# Altium PCB TSE_mother_board.PcbDoc
Units mm, origin at the board's own origin, x right, y up, seen from the top; angles counter-clockwise.
Board outline 56 x 65 mm, 4 copper layers (Top Layer, Layer 1, Layer 2, Bottom Layer), stack 1.282 mm thick; 27 components, 53 nets, 223 pads, 23 vias.
Unrouted connection lines stored in the file: 2.
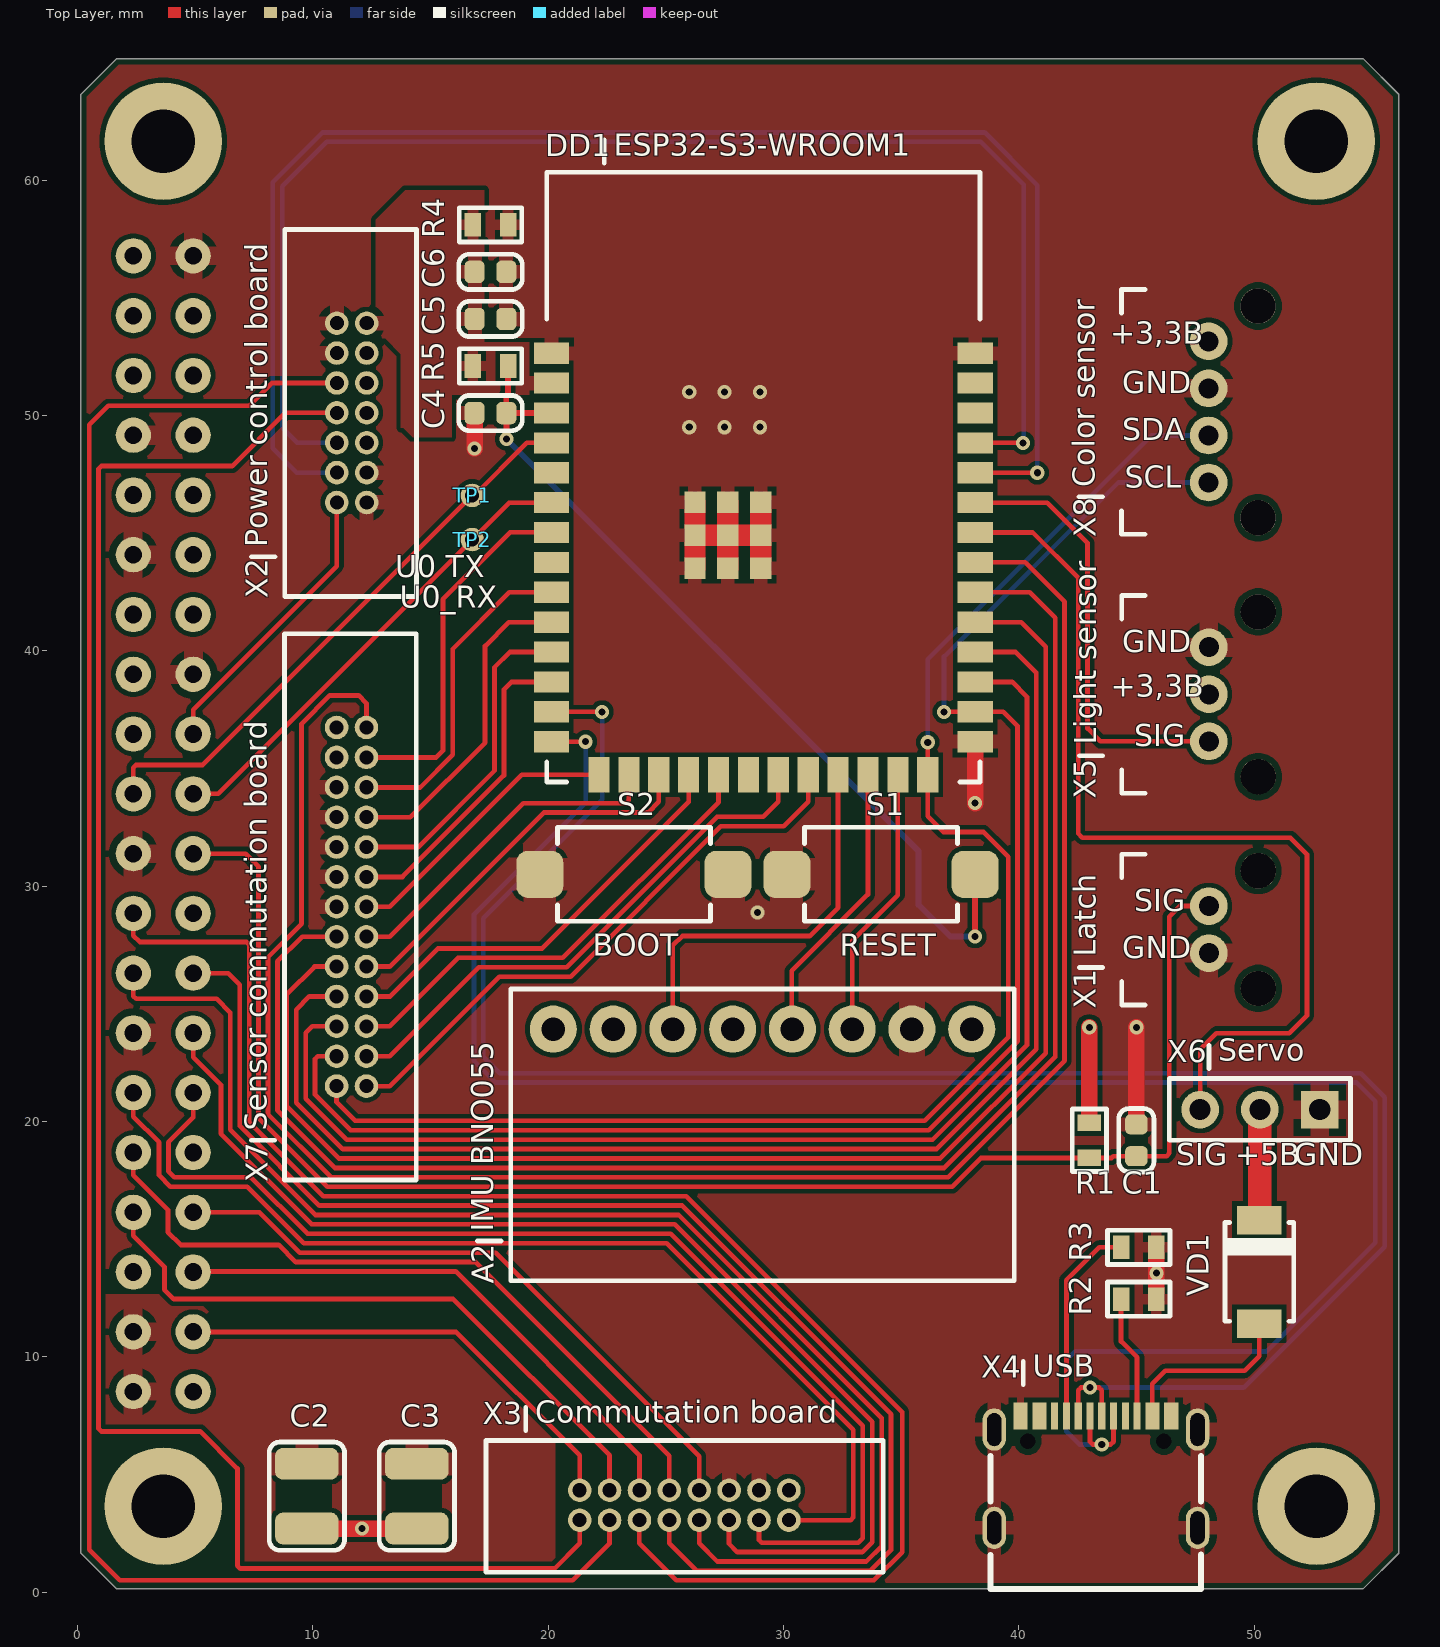
[diagram p0: Top Layer view]
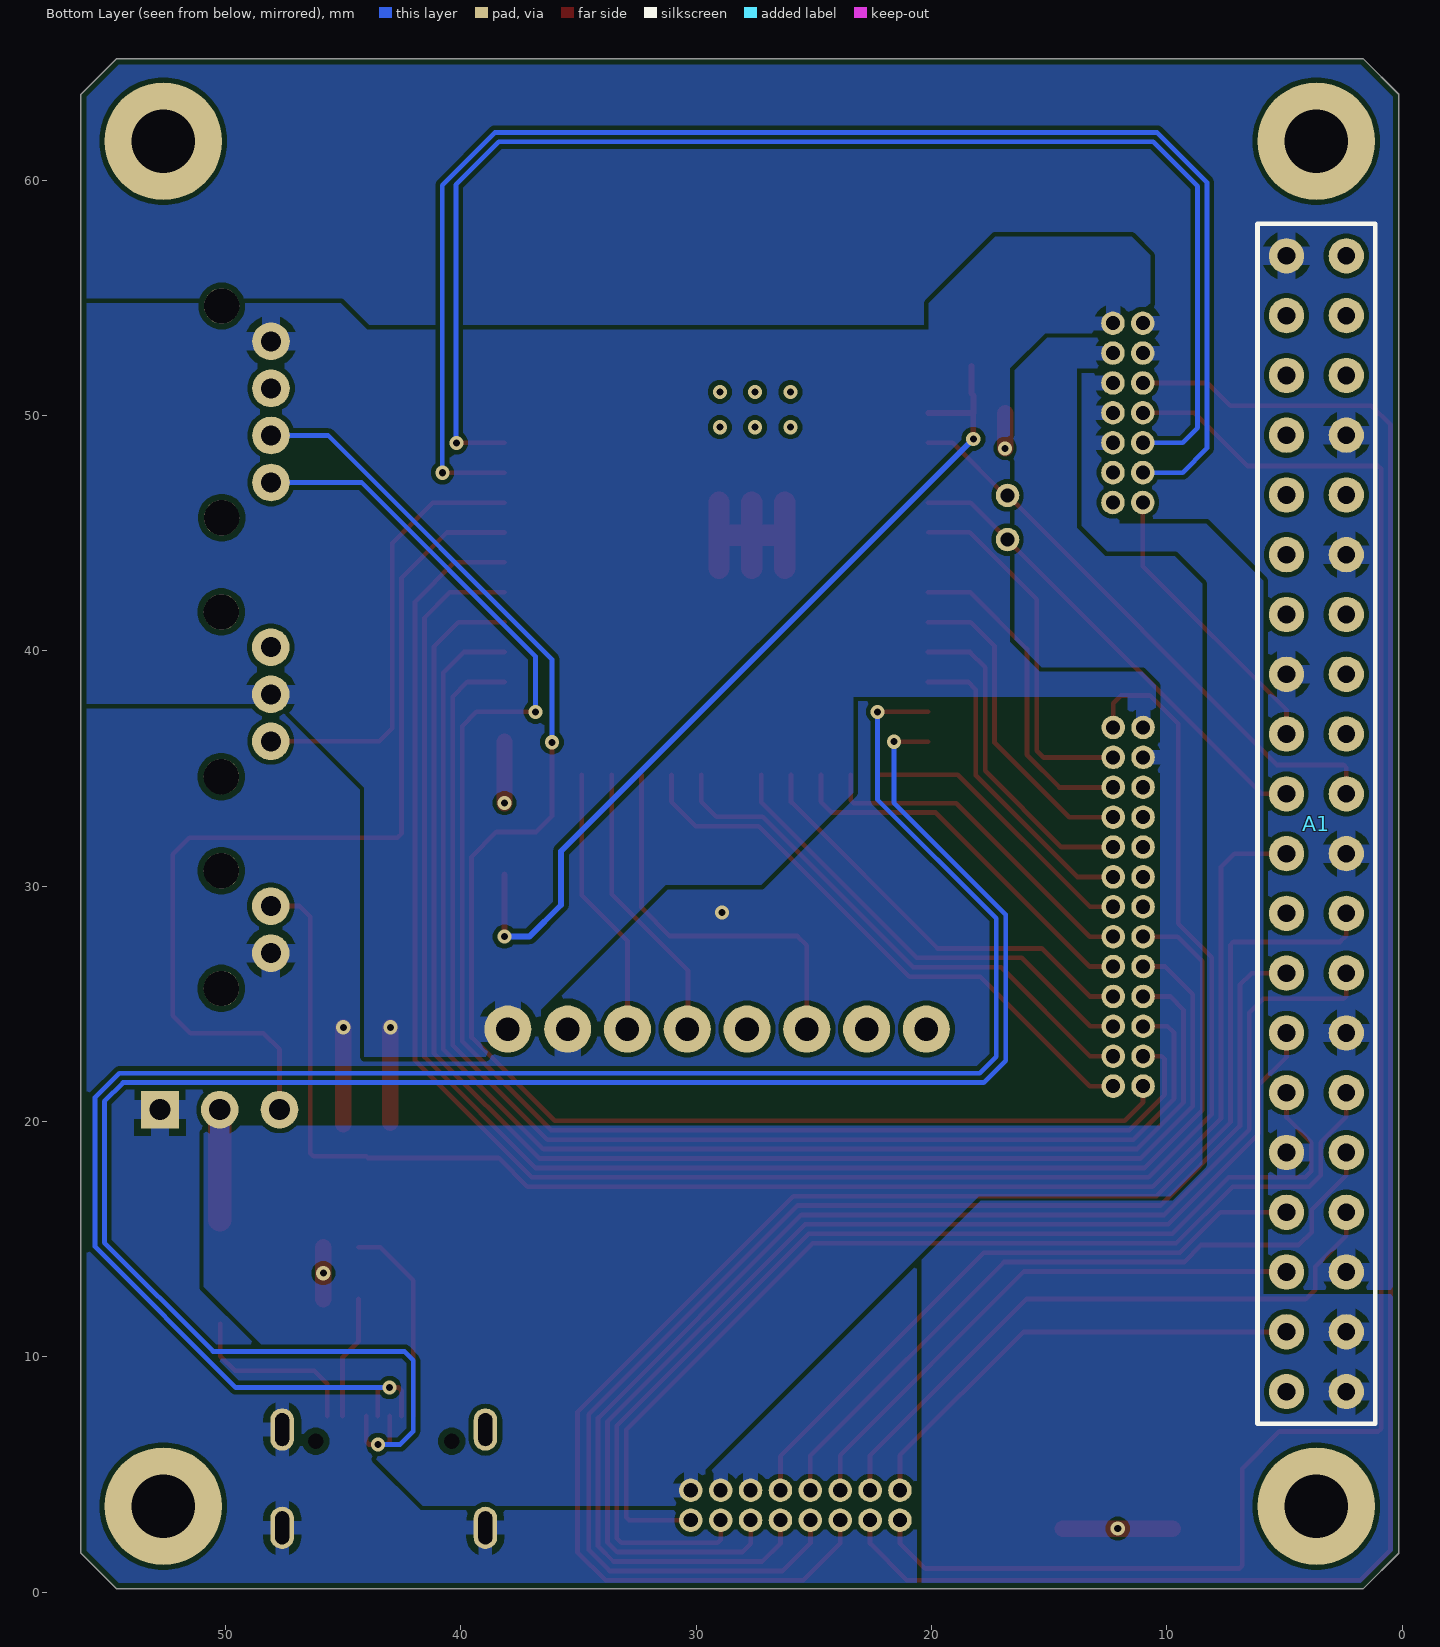
[diagram p1: Bottom Layer view, seen from below]
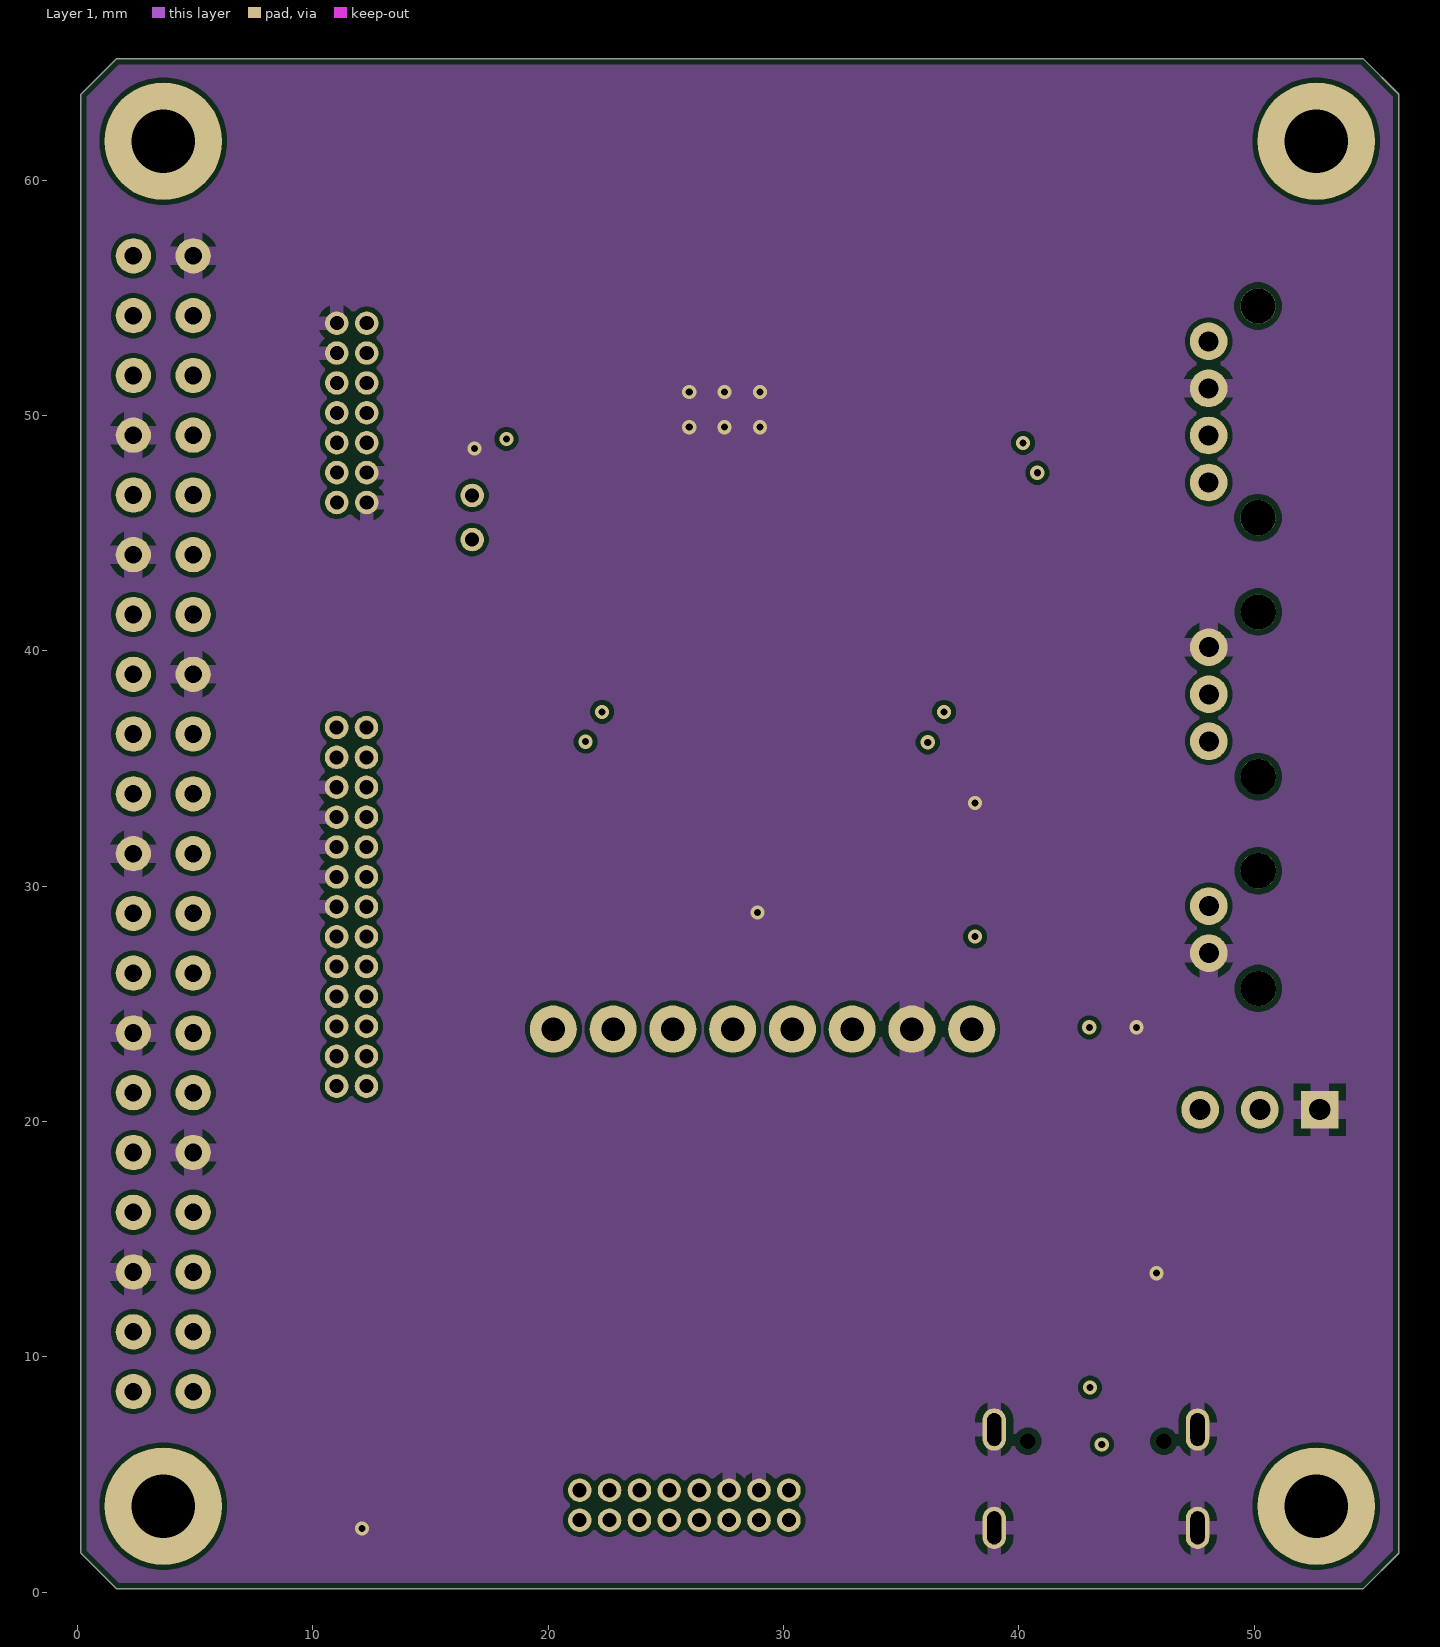
[diagram p2: Layer 1]
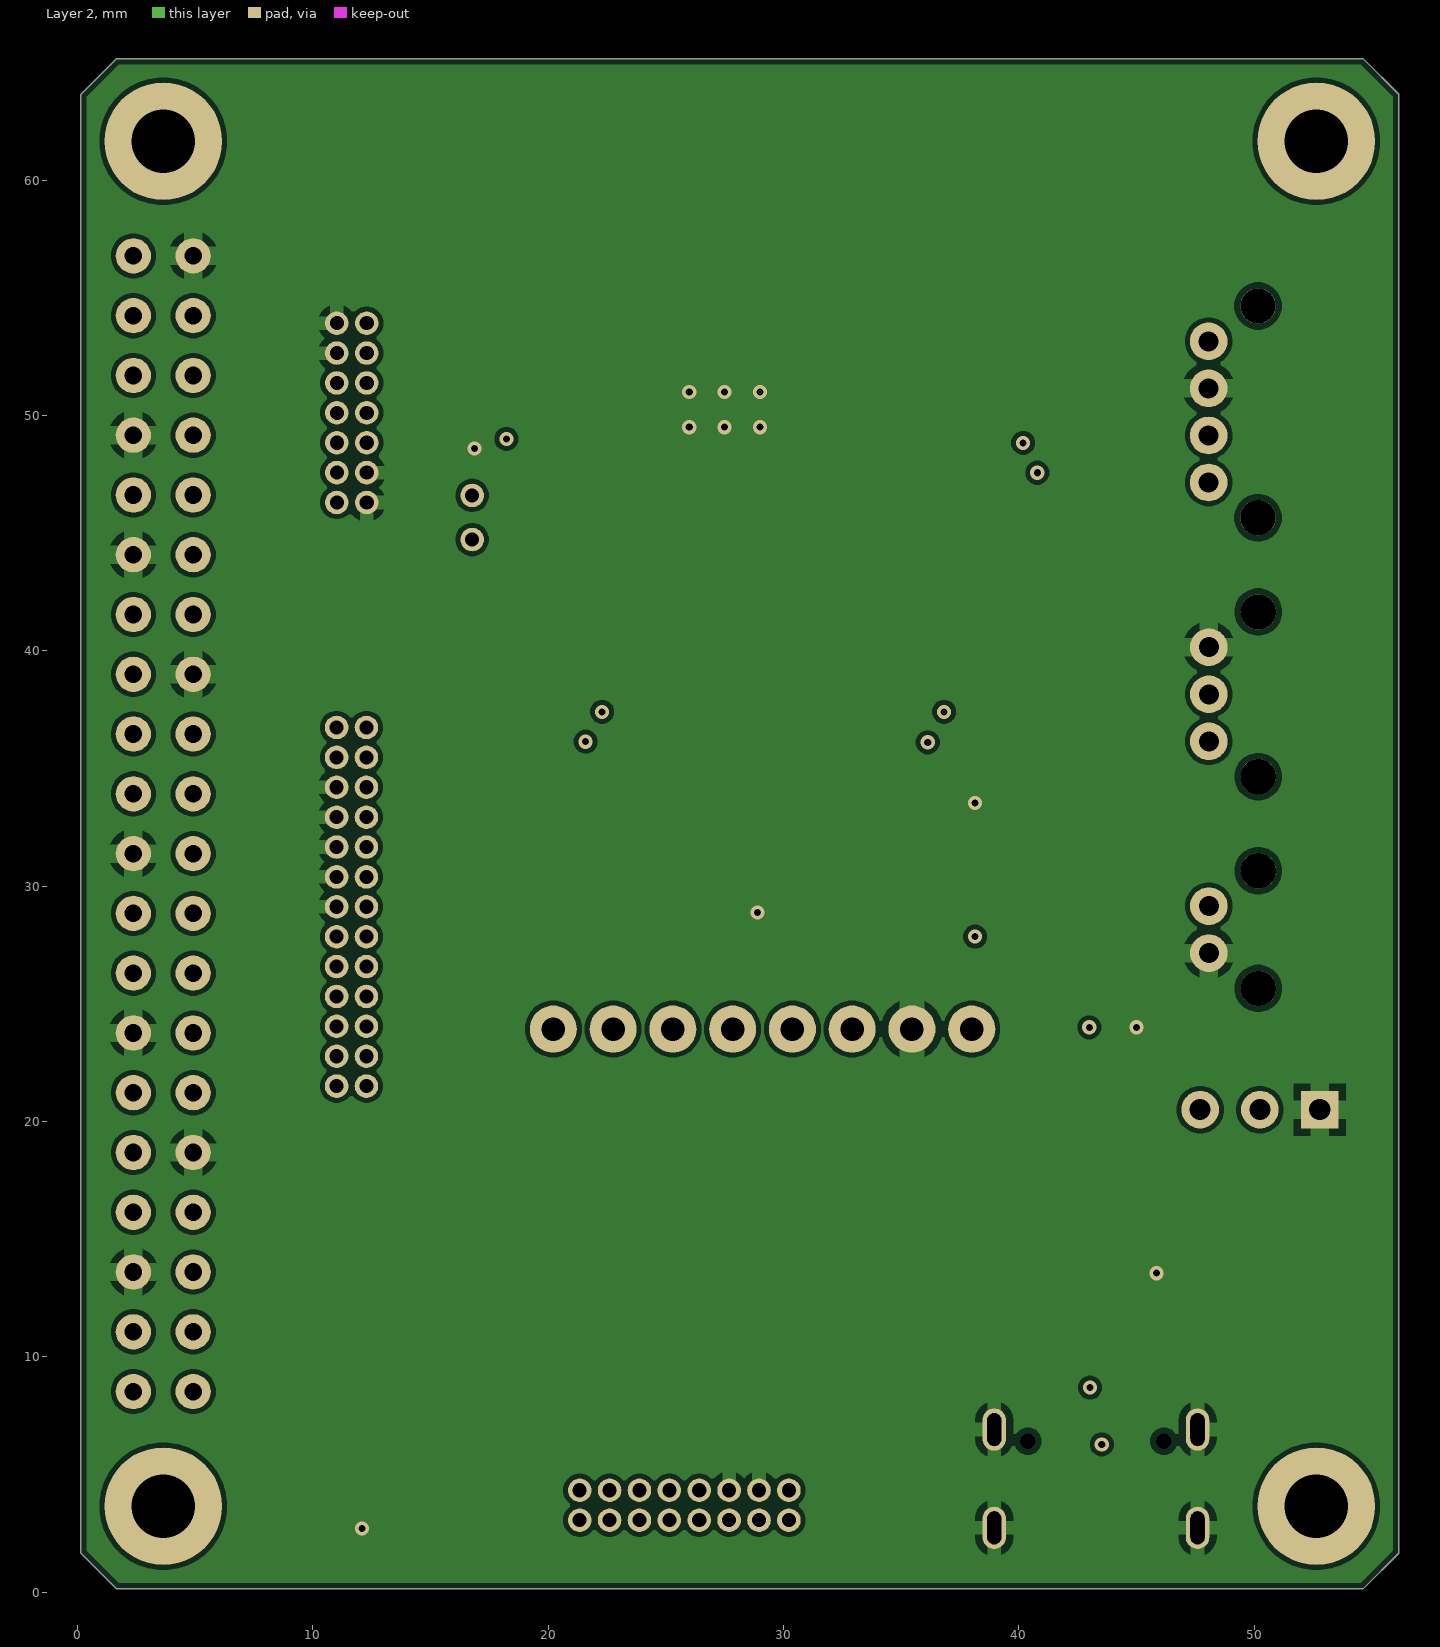
[diagram p3: Layer 2]
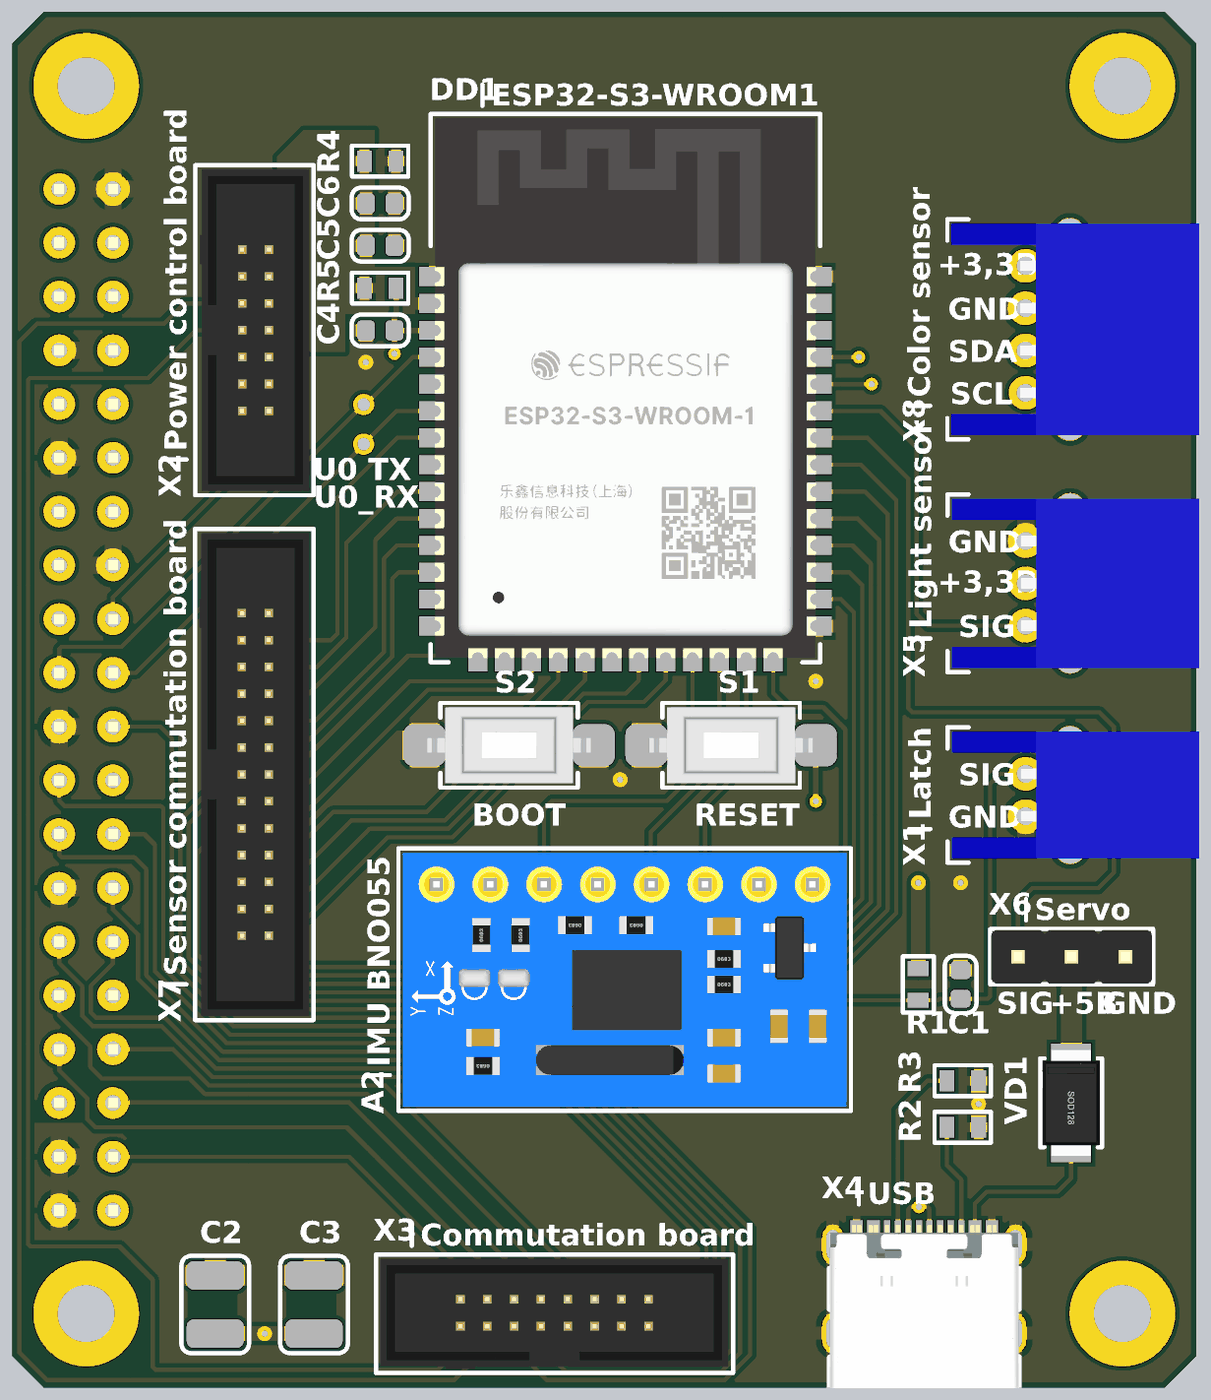
[diagram p4: 3D render of the assembled board from above, using the file's embedded part models]

## Layer stack, top to bottom
Top Solder: solder mask 0.0102, Solder Resist, Dk 3.5
Top Layer: signal copper 0.035
Dielectric 2: prepreg 0.0711, PP-006, Dk 4.1
Layer 1: signal copper 0.035
Dielectric 1: dielectric 1, FR-4, Dk 4.8
Layer 2: signal copper 0.035
Dielectric 5: prepreg 0.0711, PP-006, Dk 4.1
Bottom Layer: signal copper 0.035
Bottom Solder: solder mask 0.0102, Solder Resist, Dk 3.5

## Board outline
1.65,0.15 0.15,1.65 0.15,63.65 1.65,65.15 54.65,65.15 56.15,63.65 56.15,1.65 54.65,0.15

## Design rules (kind name [scope] priority, off if disabled: settings)
AcuteAngle min_acute_angle [OnCopper] p1: minimum=3.50000000000000E+0001 checktracksonly=FALSE // Минимальный угол между примитивами топологии
BoardOutlineClearance board_outline_clearance_std [NOT (OnLayer('Bottom Overlay') OR OnLayer('Top Overlay'))] p1: gap=0.25 ignorepadtopadclearanceinfootprint=FALSE except(0: Arc-SplitContinuation Track-SplitContinuation SMDPad-SplitContinuation THPad-SplitContinuation Via-SplitContinuation Fill-SplitContinuation Poly-SplitContinuation Region-SplitContinuation Text-SplitContinuation) // Отступ элементов топологии от края фрезеруемой печатной платы
Clearance clearance_outer_35um_std [OnTopLayer OR OnBottomLayer] p1: gap=0.2 ignorepadtopadclearanceinfootprint=TRUE except(0.25: Arc-Hole Track-Hole SMDPad-Hole THPad-Hole Via-Hole Fill-Hole Poly-Hole Region-Hole Text-Hole) // Зазоры на внешних слоях
Clearance clearance_inner_35um_std [NOT (OnTopLayer Or OnBottomLayer)] p2: gap=0.2 ignorepadtopadclearanceinfootprint=FALSE except(0.25: Arc-Hole Track-Hole SMDPad-Hole THPad-Hole Via-Hole Fill-Hole Poly-Hole Region-Hole Text-Hole) // Зазоры на внутренних слоях
ComponentClearance [All] p1: gap=0 collisioncheckmode=3 verticalgap=0 showdistances=FALSE
DiffPairsRouting diff_pairs_routing [All] p1: maxlimit=0.254 minlimit=0.127 mostfreqgap=0.254 toplayer_maxgap=0.127 toplayer_prefgap=0.127 toplayer_minwidth=0.143 toplayer_maxwidth=0.143 toplayer_prefwidth=0.143 midlayer1_minwidth=0.381 midlayer1_maxwidth=0.381 midlayer1_prefwidth=0.381 midlayer2_minwidth=0.381 midlayer2_maxwidth=0.381 midlayer2_prefwidth=0.381 bottomlayer_maxgap=0.127 bottomlayer_prefgap=0.127 bottomlayer_minwidth=0.143 bottomlayer_maxwidth=0.143 bottomlayer_prefwidth=0.143 impedanceprofiledriven=TRUE impedanceprofileid={FD46899E-B5A2-4EF5-A302-5D2DB6A51F35} maxuncoupledlength=12.7 // Правила трассировки дифференциальных пар
HoleSize min_hole_size_std [IsPad] p1: absolutevalues=TRUE maxlimit=5.9 minlimit=0.6 maxpercent=80.000 minpercent=20.000 // Диаметр межслойного переходного отверстия
HoleSize min_hole_size_via_std [IsVia] p2: absolutevalues=TRUE maxlimit=5.9 minlimit=0.3 maxpercent=80.000 minpercent=20.000 // Минимальный диаметр монтажного отверстия
HoleToHoleClearance hole_to_hole_clearance_std [All] p1: gap=0.2 allowstackedmicrovias=FALSE // Минимальное расстояние между краями двух отверстий
MinimumAnnularRing min_via_ar_std [All] p1: minimumring=0.15 // Поясок площадки переходного отверстия (Annular ring VIA)
MinimumAnnularRing min_pad_ar_std [All] p2: minimumring=0.2 // Поясок монтажной контактной площадки (Annular ring PAD)
MinimumSolderMaskSliver min_solder_mask_bridge_std [All] p1: minsoldermaskwidth=0.15 // Мнимальная ширина масочного мостика
PlaneClearance plane_clearance_35um_std [All] p1: clearance=0.2 // Отступ полигона (для слоя plane) от элементов топологии
PlaneConnect [All] p1: planeconnectstyle=Relief reliefexpansion=0.5 reliefentries=4 reliefconductorwidth=0.2 reliefairgap=0.2
PolygonConnect poly_connect_to_pad<=0.3 [(AsMM(PadXSize_AllLayers)<=0.301) or (AsMM(PadYSize_AllLayers)<=0.301)] p1: thpad.connectstyle=Relief thpad.reliefconductorwidth=0.2 thpad.reliefentries=4 thpad.polygonreliefangle="90 Angle" thpad.airgapwidth=0.2 smdpad.connectstyle=Relief smdpad.reliefconductorwidth=0.2 smdpad.reliefentries=4 smdpad.polygonreliefangle="90 Angle" smdpad.airgapwidth=0.2 via.connectstyle=Direct via.reliefconductorwidth=0.254 via.reliefentries=4 via.polygonreliefangle="90 Angle" via.airgapwidth=0.254 // Правила подключения полигонов для падов от 0,3мм и меньше
PolygonConnect poly_connect_to_pad<=0.4 [(AsMM(PadXSize_AllLayers)<=0.401) or (AsMM(PadYSize_AllLayers)<=0.401)] p2: thpad.connectstyle=Relief thpad.reliefconductorwidth=0.26 thpad.reliefentries=4 thpad.polygonreliefangle="90 Angle" thpad.airgapwidth=0.2 smdpad.connectstyle=Relief smdpad.reliefconductorwidth=0.26 smdpad.reliefentries=4 smdpad.polygonreliefangle="90 Angle" smdpad.airgapwidth=0.2 via.connectstyle=Direct via.reliefconductorwidth=0.254 via.reliefentries=4 via.polygonreliefangle="90 Angle" via.airgapwidth=0.254 // Правила подключения полигонов для падов от 0,4 и меньше
PolygonConnect poly_connect_to_pad<=0.6 [(AsMM(PadXSize_AllLayers)<=0.601) or (AsMM(PadYSize_AllLayers)<=0.601)] p3: thpad.connectstyle=Relief thpad.reliefconductorwidth=0.33 thpad.reliefentries=4 thpad.polygonreliefangle="90 Angle" thpad.airgapwidth=0.2 smdpad.connectstyle=Relief smdpad.reliefconductorwidth=0.33 smdpad.reliefentries=4 smdpad.polygonreliefangle="90 Angle" smdpad.airgapwidth=0.2 via.connectstyle=Direct via.reliefconductorwidth=0.254 via.reliefentries=4 via.polygonreliefangle="90 Angle" via.airgapwidth=0.254 // Правила подключения полигонов для падов от 0,6мм и меньше
PolygonConnect poly_connect_to_pad<=0.7 [(AsMM(PadXSize_AllLayers)<=0.701) or (AsMM(PadYSize_AllLayers)<=0.701)] p4: thpad.connectstyle=Relief thpad.reliefconductorwidth=0.46 thpad.reliefentries=4 thpad.polygonreliefangle="90 Angle" thpad.airgapwidth=0.2 smdpad.connectstyle=Relief smdpad.reliefconductorwidth=0.46 smdpad.reliefentries=4 smdpad.polygonreliefangle="90 Angle" smdpad.airgapwidth=0.2 via.connectstyle=Direct via.reliefconductorwidth=0.254 via.reliefentries=4 via.polygonreliefangle="90 Angle" via.airgapwidth=0.254 // Правила подключения полигонов для падов от 0,7мм и меньше
PolygonConnect poly_connect_to_pad<=0.8 [(AsMM(PadXSize_AllLayers)<=0.8)or(AsMM(PadYSize_AllLayers)<=0.8)] p5: thpad.connectstyle=Relief thpad.reliefconductorwidth=0.53 thpad.reliefentries=4 thpad.polygonreliefangle="90 Angle" thpad.airgapwidth=0.3 smdpad.connectstyle=Relief smdpad.reliefconductorwidth=0.53 smdpad.reliefentries=4 smdpad.polygonreliefangle="90 Angle" smdpad.airgapwidth=0.2 via.connectstyle=Direct via.reliefconductorwidth=0.254 via.reliefentries=4 via.polygonreliefangle="90 Angle" via.airgapwidth=0.254 // Правила подключения полигонов для падов от 0,8мм и меньше
PolygonConnect poly_connect_to_pad<=1 [(AsMM(PadXSize_AllLayers)<=1.01)or(AsMM(PadYSize_AllLayers)<=1.01)] p6: thpad.connectstyle=Relief thpad.reliefconductorwidth=0.6 thpad.reliefentries=4 thpad.polygonreliefangle="90 Angle" thpad.airgapwidth=0.3 smdpad.connectstyle=Relief smdpad.reliefconductorwidth=0.6 smdpad.reliefentries=4 smdpad.polygonreliefangle="90 Angle" smdpad.airgapwidth=0.2 via.connectstyle=Direct via.reliefconductorwidth=0.254 via.reliefentries=4 via.polygonreliefangle="90 Angle" via.airgapwidth=0.254 // Правила подключения полигонов для падов от 1мм и меньше
PolygonConnect poly_connect_to_pad<=1.3 [(AsMM(PadXSize_AllLayers)<=1.31)or(AsMM(PadYSize_AllLayers)<=1.31)] p7: thpad.connectstyle=Relief thpad.reliefconductorwidth=0.66 thpad.reliefentries=4 thpad.polygonreliefangle="90 Angle" thpad.airgapwidth=0.3 smdpad.connectstyle=Relief smdpad.reliefconductorwidth=0.86 smdpad.reliefentries=4 smdpad.polygonreliefangle="90 Angle" smdpad.airgapwidth=0.2 via.connectstyle=Direct via.reliefconductorwidth=0.254 via.reliefentries=4 via.polygonreliefangle="90 Angle" via.airgapwidth=0.254 // Правила подключения полигонов для падов от 1,3мм и меньше
PolygonConnect poly_connect_to_pad<=1.6 [(AsMM(PadXSize_AllLayers)<=1.61)or(AsMM(PadYSize_AllLayers)<=1.61)] p8: thpad.connectstyle=Relief thpad.reliefconductorwidth=0.8 thpad.reliefentries=4 thpad.polygonreliefangle="90 Angle" thpad.airgapwidth=0.3 smdpad.connectstyle=Relief smdpad.reliefconductorwidth=1 smdpad.reliefentries=4 smdpad.polygonreliefangle="90 Angle" smdpad.airgapwidth=0.2 via.connectstyle=Direct via.reliefconductorwidth=0.254 via.reliefentries=4 via.polygonreliefangle="90 Angle" via.airgapwidth=0.254 // Правила подключения полигонов для падов от 1,6мм и меньше
PolygonConnect poly_connect_to_pad<=1.8 [(AsMM(PadXSize_AllLayers)<=1.8)or(AsMM(PadYSize_AllLayers)<=1.8)] p9: thpad.connectstyle=Relief thpad.reliefconductorwidth=1 thpad.reliefentries=4 thpad.polygonreliefangle="90 Angle" thpad.airgapwidth=0.3 smdpad.connectstyle=Relief smdpad.reliefconductorwidth=1.2 smdpad.reliefentries=4 smdpad.polygonreliefangle="90 Angle" smdpad.airgapwidth=0.2 via.connectstyle=Direct via.reliefconductorwidth=0.254 via.reliefentries=4 via.polygonreliefangle="90 Angle" via.airgapwidth=0.254 // Правила подключения полигонов для падов от 1,8мм и меньше
PolygonConnect poly_connect_to_pad<=2 [(AsMM(PadXSize_AllLayers)<=2.01)or(AsMM(PadYSize_AllLayers)<=2.01)] p10: thpad.connectstyle=Relief thpad.reliefconductorwidth=1.1 thpad.reliefentries=4 thpad.polygonreliefangle="90 Angle" thpad.airgapwidth=0.3 smdpad.connectstyle=Relief smdpad.reliefconductorwidth=1.4 smdpad.reliefentries=4 smdpad.polygonreliefangle="90 Angle" smdpad.airgapwidth=0.2 via.connectstyle=Direct via.reliefconductorwidth=0.254 via.reliefentries=4 via.polygonreliefangle="90 Angle" via.airgapwidth=0.254 // Правила подключения полигонов для падов от 2мм и меньше
PolygonConnect poly_connect_to_pad<=2.3 [(AsMM(PadXSize_AllLayers)<=2.31)or(AsMM(PadYSize_AllLayers)<=2.31)] p11: thpad.connectstyle=Relief thpad.reliefconductorwidth=1.2 thpad.reliefentries=4 thpad.polygonreliefangle="90 Angle" thpad.airgapwidth=0.3 smdpad.connectstyle=Relief smdpad.reliefconductorwidth=1.4 smdpad.reliefentries=4 smdpad.polygonreliefangle="90 Angle" smdpad.airgapwidth=0.2 via.connectstyle=Direct via.reliefconductorwidth=0.254 via.reliefentries=4 via.polygonreliefangle="90 Angle" via.airgapwidth=0.254 // Правила подключения полигонов для падов от 2,3мм и меньше
PolygonConnect poly_connect_to_pad<=2.5 [(AsMM(PadXSize_AllLayers)<=2.51)or(AsMM(PadYSize_AllLayers)<=2.51)] p12: thpad.connectstyle=Relief thpad.reliefconductorwidth=1.2 thpad.reliefentries=4 thpad.polygonreliefangle="90 Angle" thpad.airgapwidth=0.3 smdpad.connectstyle=Relief smdpad.reliefconductorwidth=1.4 smdpad.reliefentries=4 smdpad.polygonreliefangle="90 Angle" smdpad.airgapwidth=0.2 via.connectstyle=Direct via.reliefconductorwidth=0.254 via.reliefentries=4 via.polygonreliefangle="90 Angle" via.airgapwidth=0.254 // Правила подключения полигонов для падов от 2,5мм и меньше
PolygonConnect poly_connect_to_pad<=2.7 [(AsMM(PadXSize_AllLayers)<=2.71)or(AsMM(PadYSize_AllLayers)<=2.71)] p13: thpad.connectstyle=Relief thpad.reliefconductorwidth=1.4 thpad.reliefentries=4 thpad.polygonreliefangle="90 Angle" thpad.airgapwidth=0.3 smdpad.connectstyle=Relief smdpad.reliefconductorwidth=1.6 smdpad.reliefentries=4 smdpad.polygonreliefangle="90 Angle" smdpad.airgapwidth=0.2 via.connectstyle=Direct via.reliefconductorwidth=0.254 via.reliefentries=4 via.polygonreliefangle="90 Angle" via.airgapwidth=0.254 // Правила подключения полигонов для падов от 2,7мм и меньше
PolygonConnect poly_connect_to_pad<=3 [(AsMM(PadXSize_AllLayers)<=3.01)or(AsMM(PadYSize_AllLayers)<=3.01)] p14: thpad.connectstyle=Relief thpad.reliefconductorwidth=1.6 thpad.reliefentries=4 thpad.polygonreliefangle="90 Angle" thpad.airgapwidth=0.3 smdpad.connectstyle=Relief smdpad.reliefconductorwidth=1.8 smdpad.reliefentries=4 smdpad.polygonreliefangle="90 Angle" smdpad.airgapwidth=0.2 via.connectstyle=Direct via.reliefconductorwidth=0.254 via.reliefentries=4 via.polygonreliefangle="90 Angle" via.airgapwidth=0.254 // Правила подключения полигонов для падов от 3мм и меньше
PolygonConnect poly_connect_to_pad<=7 [(AsMM(PadXSize_AllLayers)<7.01)or(AsMM(PadYSize_AllLayers)<=7.01)] p15: thpad.connectstyle=Relief thpad.reliefconductorwidth=2 thpad.reliefentries=4 thpad.polygonreliefangle="90 Angle" thpad.airgapwidth=0.4 smdpad.connectstyle=Relief smdpad.reliefconductorwidth=2 smdpad.reliefentries=4 smdpad.polygonreliefangle="90 Angle" smdpad.airgapwidth=0.3 via.connectstyle=Direct via.reliefconductorwidth=0.254 via.reliefentries=4 via.polygonreliefangle="90 Angle" via.airgapwidth=0.254 // Правила подключения полигонов для падов от 7мм и меньше
PolygonConnect poly_connect_to_pad [All] p16: thpad.connectstyle=Relief thpad.reliefconductorwidth=0.25 thpad.reliefentries=4 thpad.polygonreliefangle="90 Angle" thpad.airgapwidth=0.2 smdpad.connectstyle=Relief smdpad.reliefconductorwidth=0.25 smdpad.reliefentries=4 smdpad.polygonreliefangle="90 Angle" smdpad.airgapwidth=0.2 via.connectstyle=Direct via.reliefconductorwidth=0.25 via.reliefentries=4 via.polygonreliefangle="90 Angle" via.airgapwidth=0.2 // Правила подключения полигонов общие
RoutingCorners [All] p1 off: cornerstyle=45-Degree minsetback=2.5 maxsetback=2.5
RoutingVias [All] p1: holewidth=0.3 width=0.6 viastyle="Through Hole" minholewidth=0.3 minwidth=0.6 maxholewidth=5.9 maxwidth=6.4
SilkToSilkClearance silk_to_silk_clearance_std [All] p1 off: silktosilkclearance=0.15 // Отступ текста шелкографии от других примитивов шелкографии
SilkToSolderMaskClearance silk_to_solder_mask_clearance_std [IsPad] p1 off: minsilkscreentomaskgap=0.15 clearancetoexposedcopper=FALSE // Минимальное расстояние между элементами шелкографии и вскрытой медью
SolderMaskExpansion solder_mask_expansion_std [All] p1: expansion=0.05 istentingtop=FALSE // Припуск паяльной масски
SupplyNets "Schematic Supply Nets" [InNet('GND')] p1: voltage=0.000
SupplyNets "Schematic Supply Nets_3" [InNet('+5В')] p2: voltage=0.000
SupplyNets "Schematic Supply Nets_2" [InNet('+3,3В')] p3: voltage=0.000
SupplyNets "Schematic Supply Nets_1" [InNet('+5В_RPI')] p4: voltage=0.000
UnRoutedNet [All] p1: checkbadconnections=TRUE
Width width_35um_std [All] p1: maxlimit=10 minlimit=0.2 preferedwidth=0.2 checkconnectedcopper=TRUE // Ширина проводников (общая)
19 further rules are at their usual default settings.

## Classes and differential pairs
component class TSE_mother_board_periph_commutation: A2 X5 X6 X7 X8
component class TSE_mother_board_MCU: C4 C5 C6 DD1 R2 R3 R4 R5 S1 S2 TP1 TP2 VD1 X4
component class TSE_mother_board_CPU_commutation: A1 C1 C2 C3 R1 X1 X2 X3

## Components (designator, comment, footprint, x,y, rotation, side; value= is the part's Value field where it differs from the comment)
A1 "Raspberry Pi 5" PLS_40 3.65,32.65 r90 bottom
A2 "BNO055" BNO055 29.115,23.925 r180 top
C1 "0,1мк" C0603 45,19.2 r270 top
C2 "10мк" C1210 9.753,4.075 r90 top
C3 "10мк" C1210 14.428,4.075 r90 top
C4 "0,1мк" C0603 17.554,50.1 r0 top
C5 "0,1мк" C0603 17.554,54.1 r180 top
C6 "0,1мк" C0603 17.554,56.1 r180 top
DD1 "ESP32-S3-WROOM-1-N8" ESP32-S3-WROOM-1 29.15,43.69 r0 top
R1 "10к" R0603 43,19.2 r90 top
R2 "5,1к" R0603 45.1,12.45 r180 top
R3 "5,1к" R0603 45.1,14.65 r180 top
R4 "10к" R0603 17.554,58.1 r180 top
R5 "10к" R0603 17.554,52.1 r180 top
S1 "IT-1187" "SMD button 6x3mm" 30.15,30.5 r0 top
S2 "IT-1187" "SMD button 6x3mm" 19.65,30.5 r0 top
TP1 "TESTPOINT" TP_0,6X1 16.775,46.6 r90 top
TP2 "TESTPOINT" TP_0,6X1 16.775,44.725 r90 top
VD1 "PMEG3050EP" SOD128 50.225,13.6 r270 top
X1 "JST-S02B-PASK-2" JST-S02B-PASK-2 48.08,28.15 r270 top
X2 "IDC_14" IDC1.27_14 11.66,50.11 r270 top
X3 "IDC_16" IDC1.27_16 25.79,3.69 r0 top
X4 "USB Type-C" USB4105-15-A-120 43.28,0.127 r0 top
X5 "JST-S03B-PASK-2" JST-S03B-PASK-2 48.08,38.15 r270 top
X6 "PLS 3" pls-2,54-3-tht-v 50.25,20.5 r180 top
X7 "IDC_26" IDC1.27_26 11.65,29.12 r270 top
X8 "JST-S04B-PASK-2" JST-S04B-PASK-2 48.07,50.15 r270 top

## Footprints (in the part's own frame and the unit in brackets; to place one, negate y for a bottom-side part, rotate by r counter-clockwise, add the part's x,y. Pads: shape width x height; smd on the part's side, far side on the other; paste and mask are expansions set on the pad)
BNO055 [mm] "9-осевой гироскоп и акселерометр"
  round 2 hole 1: 1(-8.89,0) 2(-6.35,0) 3(-3.81,0) 4(-1.27,0) 5(1.27,0) 6(3.81,0) 7(6.35,0) 8(8.89,0)
  silkscreen extent -10.7,-1.7 10.7,10.7, body extent -10.5,-1.5 10.5,10.5, height 8.5
C0603 [mm] "Chip Capacitor, 2-Leads, Body 1,60x0,80mm, IPC Medium Density"
  rrect50% 0.85x0.95 smd: 1(-0.675,0) 2(0.675,0)
  Top Layer pour cut-out: -0.254,0.5 -0.254,-0.5 0.254,-0.5 0.254,0.5
  silkscreen extent -1.35,-0.75 1.35,0.75, body extent -0.85,-0.45 0.85,0.45, height 0.9
C1210 [mm] "Chip Capacitor, 2-Leads, Body 3,20x2,50mm, IPC Medium Density"
  rrect50% 1.35x2.7 smd: 1(-1.375,0) 2(1.375,0)
  Top Layer pour cut-out: -0.6,1.325 -0.6,-1.05 0.6,-1.05 0.6,1.325
  silkscreen extent -2.3,-1.6 2.3,1.6, body extent -1.7,-1.35 1.7,1.35, height 2.7
ESP32-S3-WROOM-1 [mm]
  rect 1.5x0.9 smd: 1(-9,8.955) 2(-9,7.685) 3(-9,6.415) 4(-9,5.145) 5(-9,3.875) 6(-9,2.605) 7(-9,1.335) 8(-9,0.065) 9(-9,-1.205) 10(-9,-2.475) 11(-9,-3.745) 12(-9,-5.015) 13(-9,-6.285) 14(-9,-7.555) 27(9,-7.555) 28(9,-6.285) 29(9,-5.015) 30(9,-3.745) 31(9,-2.475) 32(9,-1.205) 33(9,0.065) 34(9,1.335) 35(9,2.605) 36(9,3.875) 37(9,5.145) 38(9,6.415) 39(9,7.685) 40(9,8.955)
  rect 0.9x1.5 smd: 15(-6.985,-8.955) 16(-5.715,-8.955) 17(-4.445,-8.955) 18(-3.175,-8.955) 19(-1.905,-8.955) 20(-0.635,-8.955) 21(0.635,-8.955) 22(1.905,-8.955) 23(3.175,-8.955) 24(4.445,-8.955) 25(5.715,-8.955) 26(6.985,-8.955)
  rect 0.9x0.9 smd: 41(-2.91,-0.18) 41(-2.91,1.22) 41(-2.91,2.62) 41(-1.51,-0.18) 41(-1.51,1.22) 41(-1.51,2.62) 41(-0.11,-0.18) 41(-0.11,1.22) 41(-0.11,2.62)
  silkscreen extent -9.21,-9.27 9.21,16.64, body extent -9.01,-9.07 9.01,16.44, height 3.11
IDC1.27_14 [mm] "Разъем - 14 конт. прямая вилка на плату с шагом 1.27мм"
  round 1 hole 0.6: 1(-3.81,0.635) 2(-2.54,0.635) 3(-1.27,0.635) 4(0,0.635) 5(1.27,0.635) 6(2.54,0.635) 7(3.81,0.635) 8(-3.81,-0.635) 9(-2.54,-0.635) 10(-1.27,-0.635) 11(0,-0.635) 12(1.27,-0.635) 13(2.54,-0.635) 14(3.81,-0.635)
  silkscreen extent -7.8,-2.85 7.8,2.75, body extent -7.59,-2.65 7.59,2.55, height 5.4
IDC1.27_16 [mm] "Разъем - 16 конт. прямая вилка на плату с шагом 1.27мм"
  round 1 hole 0.6: 1(4.445,0.635) 2(3.175,0.635) 3(1.905,0.635) 4(0.635,0.635) 5(-0.635,0.635) 6(-1.905,0.635) 7(-3.175,0.635) 8(-4.445,0.635) 9(4.445,-0.635) 10(3.175,-0.635) 11(1.905,-0.635) 12(0.635,-0.635) 13(-0.635,-0.635) 14(-1.905,-0.635) 15(-3.175,-0.635) 16(-4.445,-0.635)
  silkscreen extent -8.43,-2.85 8.45,2.75, body extent -8.23,-2.65 8.23,2.55, height 5.4
IDC1.27_26 [mm] "Разъем - 26 конт. прямая вилка на плату с шагом 1.27мм"
  round 1 hole 0.6: 1(-7.62,-0.635) 2(-6.35,-0.635) 3(-5.08,-0.635) 4(-3.81,-0.635) 5(-2.54,-0.635) 6(-1.27,-0.635) 7(0,-0.635) 8(1.27,-0.635) 9(2.54,-0.635) 10(3.81,-0.635) 11(5.08,-0.635) 12(6.35,-0.635) 13(7.62,-0.635) 14(-7.62,0.635) 15(-6.35,0.635) 16(-5.08,0.635) 17(-3.81,0.635) 18(-2.54,0.635) 19(-1.27,0.635) 20(0,0.635) 21(1.27,0.635) 22(2.54,0.635) 23(3.81,0.635) 24(5.08,0.635) 25(6.35,0.635) 26(7.62,0.635)
  silkscreen extent -11.61,-2.85 11.6,2.75, body extent -11.4,-2.65 11.4,2.55, height 5.4
JST-S02B-PASK-2 [mm] "Разъем - 2 конт. угловая вилка на плату, шаг 2,00 мм"
  round 1.6 hole 0.85: 1(-1,0) 2(1,0)
  round 1.5 hole 1.5: 3(-2.5,2.1) 3(2.5,2.1)
  silkscreen extent -3.2,-3.7 3.2,-2.7, body extent -3,-3.5 3,8.2, height 6.5
JST-S03B-PASK-2 [mm] "Разъем - 3 конт. угловая вилка на плату, шаг 2,00 мм"
  round 1.6 hole 0.85: 1(-2,0) 2(0,0) 3(2,0)
  round 1.5 hole 1.5: 4(-3.5,2.1) 4(3.5,2.1)
  silkscreen extent -4.2,-3.7 4.2,-2.7, body extent -4,-3.5 4,8.2, height 6.5
JST-S04B-PASK-2 [mm] "Разъем - 4 конт. угловая вилка на плату, шаг 2,00 мм"
  round 1.6 hole 0.85: 1(-3,0) 2(-1,0) 3(1,0) 4(3,0)
  round 1.5 hole 1.5: 5(-4.5,2.1) 5(4.5,2.1)
  silkscreen extent -5.2,-3.7 5.2,-2.7, body extent -5,-3.5 5,8.2, height 6.5
pls-2,54-3-tht-v [mm]
  rect 1.6x1.6 hole 0.9: 1(-2.54,0)
  round 1.6 hole 0.9: 2(0,0) 3(2.54,0)
  silkscreen extent -3.85,-1.33 3.85,1.3, body extent -3.81,-1.27 3.81,1.27, height 8.54
PLS_40 [mm]
  round 1.5 hole 0.75: 1(-24.13,1.27) 2(-24.13,-1.27) 3(-21.59,1.27) 4(-21.59,-1.27) 5(-19.05,1.27) 6(-19.05,-1.27) 7(-16.51,1.27) 8(-16.51,-1.27) 9(-13.97,1.27) 10(-13.97,-1.27) 11(-11.43,1.27) 12(-11.43,-1.27) 13(-8.89,1.27) 14(-8.89,-1.27) 15(-6.35,1.27) 16(-6.35,-1.27) 17(-3.81,1.27) 18(-3.81,-1.27) 19(-1.27,1.27) 20(-1.27,-1.27) 21(1.27,1.27) 22(1.27,-1.27) 23(3.81,1.27) 24(3.81,-1.27) 25(6.35,1.27) 26(6.35,-1.27) 27(8.89,1.27) 28(8.89,-1.27) 29(11.43,1.27) 30(11.43,-1.27) 31(13.97,1.27) 32(13.97,-1.27) 33(16.51,1.27) 34(16.51,-1.27) 35(19.05,1.27) 36(19.05,-1.27) 37(21.59,1.27) 38(21.59,-1.27) 39(24.13,1.27) 40(24.13,-1.27)
  silkscreen extent -25.5,-2.5 25.5,2.5, body extent -25.4,-2.54 25.4,2.54, height 8.5
R0603 [mm]
  rect 0.7x1 smd: 1(-0.75,0) 2(0.75,0)
  silkscreen extent -1.33,-0.73 1.33,0.73, body extent -0.8,-0.43 0.8,0.43, height 0.45
"SMD button 6x3mm" [mm]
  rrect50% 2x2 smd: 1(0,0) 2(8,0)
  silkscreen extent 0.75,-2 7.25,2, body extent 0.11,-1.79 7.89,1.79, height 2.54
SOD128 [mm]
  rect 1.2x1.9 smd: 1(-2.2,0) 2(2.2,0)
  silkscreen extent -2.11,-1.46 2.09,1.46, body extent -2.5,-1.35 2.5,1.35, height 1.1
TP_0,6X1 [mm]
  round 1 hole 0.6: 1(0,0)
USB4105-15-A-120 [mm] "USB Type-c 16p USB4105-15-A-120"
  rect 0.3x1.15 smd: 1(-1.75,7.355) 2(-1.25,7.355) 3(-0.75,7.355) 4(-0.25,7.355) 5(0.25,7.355) 6(0.75,7.355) 7(1.25,7.355) 8(1.75,7.355)
  rect 0.6x1.15 smd: 9(-2.4,7.355) 9(2.4,7.355) 10(-3.2,7.355) 10(3.2,7.355)
  oval 1x1.8 hole 0.6 slot 1.4 at 90 deg: TP(-4.32,2.6) TP(-4.32,6.78) TP(4.32,2.6) TP(4.32,6.78)
  round 0 hole 0.65 unplated: ""(-2.89,6.28) ""(2.89,6.28)
  silkscreen extent -4.47,0 4.47,5.65, body extent -4.47,0 4.47,7.7, height 3.26

## Part data
A1: "Микрокомпьютер", Наименование="Raspberry Pi 5"
A2: "9-осевой гироскоп и акселерометр", Наименование=BNO055
C1: library part CC0603JPX7R9BB104, "Конденсатор кер. 0,1мкФ 50В", Manufacturer=Yageo, Name=CC0603JPX7R9BB104, TKE=X7R
C2 C3: library part CL32A106KATLNNE, "Конденсатор кер. 10мкФ 35В", Manufacturer=Yageo, Voltage=35В, Name=CC1206KKX7R8BB106, TKE=X7R
C4 C5 C6: library part CC0603JPX7R9BB104, "Конденсатор кер. 0,1мкФ 50В", Manufacturer=Yageo, Voltage=50В, Name=CC0603JPX7R9BB104, TKE=X7R
DD1: "Микроконтроллер", Наименование=ESP32-S3-WROOM-1-N8
R1 R4 R5: library part RC0603FR-0710KL, "Резистор 10кОм 0,063Вт 1%", Manufacturer=YAGEO, Tolerance=1%, Name=RC0603FR-0710KL
R2 R3: library part RC0603FR-075K1L, "Резистор 5,1кОм 0,1Вт 1%", Manufacturer=YAGEO, Tolerance=1%, Name=RC0603FR-075K1L
S1 S2: library part button, "тактовая кнопка SMD", Name=IT-1187
TP1 TP2: library part TESTPOINT_HOLE, Name=TESTPOINT
VD1: library part PMEG3050EP_1, "Диод Шоттки 30В 5А", Manufacturer=NXP, Name=PMEG3050EP
X1: "Разъем - 2 конт. угловая вилка на плату, шаг 2,00 мм", Contact_1=C, Contact_2=NO, Наименование=JST-S02B-PASK-2
X2: "Разъем - 14 конт. прямая вилка на плату", Contact_1=+3,3В, Contact_2=+5В, Contact_3=+5В_RPI, Contact_4=+5В_RPI, Contact_5=+5В_RPI, Contact_6=GND, Contact_7=GND, Contact_8=GND, Contact_9=GND, Contact_10=BTN_PWR+, Contact_11=BTN_PWR-, Contact_12=MOTORS_TX, Contact_13=MOTORS_RX, Contact_14=BAT_MEAS, Наименование=IDC_14
X3: "Разъем - 16 конт. прямая вилка на плату", Contact_1=+5В, Contact_2=GND, Contact_3=GND, Contact_4=ENC_A, Contact_5=ENC_B, Contact_6=ENC_BTN, Contact_7=RPI_BTN, Contact_8=DISP_DIN, Contact_9=DISP_CLK, Contact_10=DISP_CS, Contact_11=DISP_DS, Contact_12=DISP_RST, Contact_13=LD_TX, Contact_14=LD_PWR, Contact_15=BTN_PWR+, Contact_16=BTN_PWR-, Наименование=IDC_16
X4: library part USB4105-15-A-120, "USB Type-C USB4105-GF-A / GCT", Contact_1=SBU2, Contact_2=CC1, Contact_3=Dn2, Contact_4=Dp1, Contact_5=Dn1, Contact_6=Dp2, Contact_7=SBU1, Contact_8=CC2, Contact_9=VCC, Contact_10=GND, Name="USB Type-C"
X5: "Разъем - 3 конт. угловая вилка на плату, шаг 2,00 мм", Contact_1=GND, Contact_2=+5В, Contact_3=SIGNAL, Наименование=JST-S03B-PASK-2
X6: library part "PLS-3 ICSP_1", "Разъем - 6 конт. 3, шаг 2,54 мм", Contact_1=GND, Contact_2=+5В, Contact_3=SIGNAL, Name="PLS 3"
X7: "Разъем - 26 конт. прямая вилка на плату", Contact_1=+3,3В, Contact_2=+5В, Contact_3=GND, Contact_4=GND, Contact_5=GND, Contact_6=GND, Contact_7=GND, Contact_8=SWITCH_FL, Contact_9=SWITCH_FR, Contact_10=SWITCH_BL, Contact_11=SWITCH_BR, Contact_12=SCL, Contact_13=SDA, Contact_14=LED_DIN, Contact_15=VL1_INT, Contact_16=VL1_LPn, Contact_17=VL2_INT, Contact_18=VL2_LPn, Contact_19=VL3_INT, Contact_20=VL3_LPn, Contact_21=VL4_INT, Contact_22=VL4_LPn, Contact_23=VL5_INT, Contact_24=VL5_LPn, Contact_25=VL6_INT, Contact_26=VL6_LPn, Наименование=IDC_26
X8: "Разъем - 4 конт. угловая вилка на плату, шаг 2,00 мм", Contact_1=+3,3В, Contact_2=GND, Contact_3=SDA, Contact_4=SCL, Наименование=JST-S04B-PASK-2

## Free pads (board coordinates)
  round 5 hole 2.7: 0(3.65,3.65) 0(3.65,61.65) 0(52.65,3.65) 0(52.65,61.65)

## Via types
v1: diameter 0.6, hole 0.3, Top Layer to Bottom Layer, 23 vias

## Nets (pads, with @x,y where several pads share a name; then routed paths per layer and width w, separated by ;. In a path a pad name is that pad's centre, name@x,y a point inside that pad or via, vN(x,y) a via of type N, cw(c..) or ccw(c..) an arc to the next point about the centre after c; other vN are vias at no path point)
+3,3В: A2.1 C5.2 C6.2 DD1.2 R1.2 R4.2 R5.2 X2.1 X5.2 X7.1 X8.1 | length 4.1
  Top Layer w0.7: R1.2 v1(43,24)
+5В: VD1.1 X2.2 X3.1 X6.2 X7.2 | length 4.7
  Top Layer w0.2: VD1.1 VD1.1@50.25,15.825
  Top Layer w1: VD1.1@50.25,15.825 X6.2
+5В_RPI: A1.2 A1.4 C2.2 C3.2 X2.3 X2.4 X2.5
BTN_PWR+: X2.10 X3.15 | length 83.4
  Top Layer w0.2: X2.10 8.28,51.38 7.313,50.413 1.313,50.413 0.5,49.6 0.5,1.795 1.795,0.5 21.05,0.5 22.615,2.065 X3.15
BTN_PWR-: X2.11 X3.16 | length 78.7
  Top Layer w0.2: X2.11 8.835,50.11 6.575,47.85 1.017,47.85 0.9,47.733 0.9,6.942 1.017,6.825 5.225,6.825 6.8,5.25 6.8,1.117 6.917,1 20.275,1 21.345,2.07 X3.16
GND: A1.6 A1.9 A1.14 A1.20 A1.25 A1.30 A1.34 A1.39 A2.2 C1.1 C2.1 C3.1 C4.1 C5.1 C6.1 DD1.1 DD1.27 DD1.40 DD1.41 R2.1 R3.1 R4.1 S1.1 S2.1 S2.2 X1.2 X2.6 X2.7 X2.8 X2.9 X3.2 X3.3 X4.10 X4.TP X5.1 X6.1 X7.3 X7.4 X7.5 X7.6 X7.7 X8.2 | length 26.3
  Top Layer w0.7: C2.1 C3.1 ; v1(16.875,48.6) 16.879,48.604 C4.1 ; v1(38.15,33.525) DD1.27 ; C1.1 v1(45,24) ; R2.1 R3.1
  Top Layer w0.9: DD1.41@26.24,43.51 DD1.41@26.24,44.91 ; DD1.41@26.24,46.31 DD1.41@26.24,44.91 ; DD1.41@27.64,43.51 DD1.41@27.64,44.91 ; DD1.41@27.64,46.31 DD1.41@27.64,44.91 ; DD1.41@29.04,43.51 DD1.41@29.04,44.91 ; DD1.41@29.04,46.31 DD1.41@29.04,44.91 ; DD1.41@26.24,44.91 DD1.41@27.64,44.91 ; DD1.41@27.64,44.91 DD1.41@29.04,44.91
  other v1: 12.091,2.7 45.85,13.55 28.9,28.875 26,49.5 27.5,49.5 29,49.5 26,51 27.5,51 29,51
MCU_I2C_PERIPH_SCL: DD1.28 X7.12 X8.4 | length 67.9
  Top Layer w0.2: X7.12 10.217,22.77 10.1,22.653 10.1,21.132 11.607,19.625 36.172,19.625 39.95,23.403 39.95,36.8 39.345,37.405 DD1.28 v1(36.83,37.405)
  Bottom Layer w0.2: v1(36.83,37.405) 36.83,39.755 44.225,47.15 X8.4
MCU_I2C_PERIPH_SDA: DD1.26 X7.13 X8.3 | length 65.4
  Top Layer w0.2: X7.13 11.015,20.81 11.8,20.025 36.006,20.025 39.55,23.569 39.55,31.25 38.5,32.3 36.8,32.3 36.135,32.965 DD1.26 v1(36.135,36.11)
  Bottom Layer w0.2: v1(36.135,36.11) 36.135,39.635 45.65,49.15 X8.3
MCU_IMU_INT: A2.6 DD1.23 | length 16.9
  Top Layer w0.2: A2.6 25.305,27.48 25.7,27.875 31.125,27.875 32.325,29.075 DD1.23
MCU_IMU_UART1_RX: A2.3 DD1.25 | length 11.6
  Top Layer w0.2: A2.3 32.925,27.675 34.865,29.615 DD1.25
MCU_IMU_UART1_TX: A2.4 DD1.24 | length 12.2
  Top Layer w0.2: A2.4 30.35,23.96 30.35,26.4 33.595,29.645 DD1.24
MCU_LED_STRIP_SIGNAL: DD1.33 X7.14 | length 82.6
  Top Layer w0.2: X7.14 12.285,37.765 11.95,38.1 10.725,38.1 9.525,36.9 9.525,28.4 8.1,26.975 8.1,20.303 10.778,17.625 37,17.625 41.95,22.575 41.95,42.084 40.279,43.755 DD1.33
MCU_LIGHT_SENSOR_SIGNAL: DD1.35 X5.3 | length 18.7
  Top Layer w0.2: DD1.35 41.205,46.295 42.925,44.575 42.925,36.7 43.475,36.15 X5.3
MCU_MOTORS_UART2_RX: DD1.37 X2.12 | length 58.9
  Top Layer w0.2: DD1.37 v1(40.19,48.835)
  Bottom Layer w0.2: X2.12 9.335,48.84 8.7,49.475 8.7,59.734 10.591,61.625 38.384,61.625 40.215,59.794 40.215,48.86 v1(40.19,48.835)
MCU_MOTORS_UART2_TX: DD1.36 X2.13 | length 63.6
  Top Layer w0.2: DD1.36 v1(40.79,47.565)
  Bottom Layer w0.2: X2.13 9.33,47.57 8.3,48.6 8.3,59.9 10.425,62.025 38.55,62.025 40.79,59.785 v1(40.79,47.565)
MCU_SERVO_SIGNAL: DD1.34 X6.3 | length 40.7
  Top Layer w0.2: DD1.34 40.6,45.025 42.525,43.1 42.525,32.235 42.707,32.053 51.547,32.053 52.25,31.35 52.25,24.499 51.501,23.75 48.4,23.75 47.71,23.06 X6.3
MCU_SWITCH_BL: DD1.30 X7.10 | length 58.9
  Top Layer w0.2: X7.10 9.86,25.31 9.3,24.75 9.3,20.8 11.275,18.825 36.503,18.825 40.75,23.072 40.75,39.075 39.88,39.945 DD1.30
MCU_SWITCH_BR: DD1.29 X7.11 | length 54.5
  Top Layer w0.2: X7.11 9.976,24.04 9.7,23.764 9.7,20.966 11.441,19.225 36.337,19.225 40.35,23.238 40.35,38.05 39.725,38.675 DD1.29
MCU_SWITCH_FL: DD1.32 X7.8 | length 67.8
  Top Layer w0.2: X7.8 9.55,27.85 8.5,26.8 8.5,20.469 10.944,18.025 36.834,18.025 41.55,22.741 41.55,41.405 40.47,42.485 DD1.32
MCU_SWITCH_FR: DD1.31 X7.9 | length 63.1
  Top Layer w0.2: X7.9 10.08,26.58 8.9,25.4 8.9,20.635 11.11,18.425 36.669,18.425 41.15,22.906 41.15,40.175 40.11,41.215 DD1.31
MCU_USB_D+: DD1.14 X4.4 X4.6 | length 85.2
  Top Layer w0.2: DD1.14 v1(21.6,36.135) ; X4.4 43.03,6.392 43.147,6.275 v1(43.53,6.275) 43.913,6.275 44.03,6.392 X4.6
  Bottom Layer w0.2: v1(21.6,36.135) 21.6,33.541 17,28.941 16.85,28.791 16.85,22.584 17,22.434 17.784,21.65 54.359,21.65 55.15,20.859 55.15,14.841 50.534,10.225 42.4,10.225 42.025,9.85 42.025,6.825 42.575,6.275 v1(43.53,6.275)
MCU_USB_D-: DD1.13 X4.3 X4.5 | length 82.5
  Top Layer w0.2: DD1.13 v1(22.3,37.405) ; X4.3 42.53,8.572 42.647,8.689 v1(43.03,8.689) 43.413,8.689 43.53,8.572 X4.5
  Bottom Layer w0.2: v1(22.3,37.405) 22.3,33.675 17.25,28.625 17.25,22.75 17.95,22.05 54.525,22.05 55.55,21.025 55.55,14.675 49.564,8.689 v1(43.03,8.689)
MCU_VL1_INT: DD1.7 X7.15 | length 15.6
  Top Layer w0.2: X7.15@12.285,35.46 15.235,35.46 15.535,35.76 15.535,42.185 18.385,45.035 DD1.7@20.14,45.035
MCU_VL1_LPn: DD1.9 X7.16 | length 13.9
  Top Layer w0.2: X7.16@12.285,34.19 14.565,34.19 15.95,35.575 15.95,40.075 18.36,42.485 DD1.9
MCU_VL2_INT: DD1.10 X7.17 | length 13.7
  Top Layer w0.2: X7.17@12.285,32.92 14.145,32.92 17.325,36.1 17.325,40.2 18.34,41.215 DD1.10
MCU_VL2_LPn: DD1.11 X7.18 | length 13.9
  Top Layer w0.2: X7.18 14.485,31.66 17.725,34.9 17.725,39.3 18.37,39.945 DD1.11
MCU_VL3_INT: DD1.12 X7.19 | length 13.4
  Top Layer w0.2: X7.19 13.815,30.39 18.125,34.7 18.125,38.35 18.45,38.675 DD1.12
MCU_VL3_LPn: DD1.15 X7.20 | length 12.2
  Top Layer w0.2: X7.20 13.27,29.12 18.885,34.735 DD1.15
MCU_VL4_INT: DD1.16 X7.21 | length 14.6
  Top Layer w0.2: X7.21 13.275,27.85 18.95,33.525 23.318,33.525 23.435,33.642 DD1.16
MCU_VL4_LPn: DD1.17 X7.22 | length 16.5
  Top Layer w0.2: X7.22 13.28,26.58 19.825,33.125 24.25,33.125 24.705,33.58 DD1.17
MCU_VL5_INT: DD1.18 X7.23 | length 18.3
  Top Layer w0.2: X7.23 13.285,25.31 15.325,27.35 19.75,27.35 25.975,33.575 DD1.18
MCU_VL5_LPn: DD1.19 X7.24 | length 20.1
  Top Layer w0.2: X7.24 13.265,24.04 16.175,26.95 20.625,26.95 27.245,33.57 DD1.19
MCU_VL6_INT: DD1.21 X7.25 | length 23.1
  Top Layer w0.2: X7.25 13.27,22.77 17.05,26.55 20.791,26.55 27.183,32.942 29.142,32.942 29.785,33.585 DD1.21
MCU_VL6_LPn: DD1.22 X7.26 | length 24.9
  Top Layer w0.2: X7.26 13.275,21.5 17.925,26.15 20.956,26.15 27.349,32.542 30.017,32.542 31.055,33.58 DD1.22
NetC4_2: C4.2 DD1.3 R5.1 S1.2 | length 37.7
  Top Layer w0.25: v1(18.229,49) C4.2 ; R5.1 18.304,50.929 18.225,50.85 18.225,50.104 C4.2 ; DD1.3@20.145,50.1 C4.2 ; v1(38.15,27.85) S1.2
  Bottom Layer w0.25: v1(18.229,49) 35.75,31.479 35.75,29.2 37.1,27.85 v1(38.15,27.85)
NetR2_2: R2.2 X4.8 | length 5.2
  Top Layer w0.2: R2.2 44.35,10.65 45.03,9.97 X4.8
NetR3_2: R3.2 X4.2 | length 8.7
  Top Layer w0.2: X4.2 42.03,13.255 43.425,14.65 R3.2
NetVD1_2: VD1.2 X4.9 | length 7.8
  Top Layer w0.2: X4.9@45.68,7.482 45.68,8.855 46.225,9.4 49.6,9.4 50.225,10.025 VD1.2
RPI_BAT_MEASURE: A1.23 X2.14 | length 12.4
  Top Layer w0.2: A1.23 4.92,37.495 11.025,43.6 X2.14
RPI_BTN: A1.8 X3.7 | length 27.2
  Top Layer w0.2: A1.8 2.38,15.145 3.7,13.825 3.7,12.85 4.1,12.45 15.975,12.45 22.615,5.81 X3.7
RPI_DISP_CLK: A1.12 X3.9 | length 44.5
  Top Layer w0.2: A1.12 2.38,20.195 3.47,19.105 3.47,17.714 3.954,17.23 4.145,17.23 7.211,17.23 9.616,14.825 25.047,14.825 32.975,6.897 32.975,3.172 32.858,3.055 X3.9
RPI_DISP_CS: A1.11 X3.10 | length 47.9
  Top Layer w0.2: A1.11 4.92,20.17 3.87,19.12 3.87,17.88 4.12,17.63 7.376,17.63 9.781,15.225 25.212,15.225 33.375,7.062 33.375,2.288 33.187,2.1 29.082,2.1 28.965,2.217 X3.10
RPI_DISP_DIN: A1.3 X3.8 | length 20.1
  Top Layer w0.2: A1.3@4.92,11.05 16.1,11.05 21.345,5.805 X3.8
RPI_DISP_DS: A1.13 X3.11 | length 50
  Top Layer w0.2: A1.13 4.92,22.73 6.1,21.55 6.1,19.475 9.95,15.625 25.378,15.625 33.775,7.228 33.775,2.122 33.353,1.7 28.05,1.7 27.69,2.06 X3.11@27.69,3.055
RPI_DISP_RST: A1.16 X3.12 | length 57.9
  Top Layer w0.2: A1.16 2.38,25.326 2.497,25.209 5.916,25.209 6.5,24.625 6.5,19.641 10.116,16.025 25.544,16.025 34.175,7.394 34.175,1.956 33.519,1.3 27.2,1.3 26.42,2.08 X3.12@26.42,3.055
RPI_ENC_A: A1.7 X3.4 | length 27.2
  Top Layer w0.2: A1.7 7.735,16.14 9.45,14.425 17.775,14.425 26.425,5.775 X3.4
RPI_ENC_B: A1.10 X3.5 | length 30.7
  Top Layer w0.2: A1.10 2.38,17.72 3.85,16.25 3.85,15.3 4.4,14.75 8.55,14.75 9.275,14.025 16.925,14.025 25.155,5.795 X3.5
RPI_ENC_BTN: A1.5 X3.6 | length 23.7
  Top Layer w0.2: A1.5@4.92,13.625 16.075,13.625 23.885,5.815 X3.6
RPI_LATCH_SIGNAL: A1.19 C1.2 R1.1 X1.1 | length 66.1
  Top Layer w0.2: A1.19 7.145,31.38 7.7,30.825 7.7,20.138 10.613,17.225 37.175,17.225 38.4,18.45 R1.1 43.95,18.45 44.025,18.525 C1.2 46.283,18.525 46.4,18.642 46.4,28.7 46.85,29.15 X1.1
RPI_LD_PWM: A1.18 X3.14 | length 65.7
  Top Layer w0.2: A1.18 2.38,27.895 2.65,27.625 7.183,27.625 7.3,27.508 7.3,19.972 10.447,16.825 25.875,16.825 35.05,7.65 35.05,1.7 33.85,0.5 25.45,0.5 23.88,2.07 X3.14@23.88,3.055
RPI_LD_TX: A1.15 X3.13 | length 58
  Top Layer w0.2: A1.15 6.405,26.3 6.9,25.805 6.9,19.806 10.281,16.425 25.709,16.425 34.575,7.559 34.575,1.791 33.684,0.9 26.325,0.9 25.15,2.075 X3.13@25.15,3.055
RPI_MCU_UART0_RX: A1.21 DD1.6 TP2.1 | length 20.4
  Top Layer w0.2: A1.21 5.979,33.92 TP2.1@16.78,44.72 ; TP2.1 18.345,46.295 DD1.6
RPI_MCU_UART0_TX: A1.22 DD1.4 TP1.1 | length 24.6
  Top Layer w0.2: A1.22 2.375,33.925 2.375,35.033 2.492,35.15 5.325,35.15 TP1.1 ; TP1.1@16.82,46.555 19.1,48.835 DD1.4
pads on no net: A1.1 A1.17 A1.24 A1.26 A1.27 A1.28 A1.29 A1.31 A1.32 A1.33 A1.35 A1.36 A1.37 A1.38 A1.40 A2.5 A2.7 A2.8 DD1.5 DD1.8 DD1.20 DD1.38 DD1.39 X1.3 X4. X4.1 X4.7 X5.4 X8.5

## Polygon pours and split planes (outlines as drawn)
GND on Bottom Layer "GND_L04_P015" (solid, remove dead copper, pour order 15): 1.65,0.15 0.15,1.65 0.15,63.65 1.65,65.15 54.65,65.15 56.15,63.65 56.15,1.65 54.65,0.15
+3,3В on Bottom Layer "+3,3В_L04_P002" (solid, remove dead copper, pour order 2): 31.287,30.05 36.6,24.737 36.6,22.75 44.1,22.75 44.1,34.175 47.675,37.75 56.15,37.75 56.15,54.775 45.1,54.775 43.975,53.65 20.125,53.65 20.125,54.775 17.3,57.6 11.5,57.6 10.7,56.8 10.7,53.5 15.175,53.5 16.675,52 16.675,40.375 15.4,39.1 11.05,39.1 10.475,38.525 10.475,36.1 11.675,36.1 11.675,38.05 23.325,38.05 23.325,33.962 27.237,30.05
+5В on Bottom Layer "+5В_L04_P004" (solid, remove dead copper, pour order 4): 41.625,3.675 50.925,12.975 50.925,19.825 46.725,19.825 10.275,19.825 10.275,34.825 10.675,34.825 10.675,36.1 10.275,36.1 10.275,38.325 11.05,39.1 12.275,39.1 12.3,39.075 16.675,39.075 16.675,52 15.375,53.3 10.7,53.3 10.7,52 13.825,52 13.825,45.225 12.619,44.019 9.669,44.019 8.5,42.85 8.5,18.175 9.85,16.825 18,16.825 29.625,5.2 29.625,3.7 29.65,3.675
+5В_RPI on Bottom Layer "+5В_RPI_L04_P005" (solid, remove dead copper, pour order 5): 8.5,18.175 9.85,16.825 18.05,16.825 20.425,14.45 20.425,0.15 1.65,0.15 0.15,1.65 0.15,12.3 0.5,12.65 5.9,12.65 5.9,42.975 8.325,45.4 12.025,45.4 12.025,48.15 12,48.175 10.662,48.175 10.662,52 13.825,52 13.825,45.225 12.619,44.019 9.669,44.019 8.5,42.85
GND on Top Layer "GND_L01_P014" (solid, remove dead copper, pour order 14): 1.65,0.15 0.15,1.65 0.15,63.65 1.65,65.15 54.65,65.15 56.15,63.65 56.15,1.65 54.65,0.15
GND on Top Layer "GND_L01_P013" (solid, pour order 13): 27.03,32.225 32.325,32.225 32.325,29.075 31.125,27.875 25.7,27.875 25.625,27.95 25.625,30.825
GND on Top Layer "GND_L01_P011" (solid, remove dead copper, pour order 11): 37.2,53.65 37.2,53.295 37.495,53 38,53 39,52 33.9,52 32.6,50.7 32.6,42.65 31.325,41.375 23.525,41.375 22.725,42.175 22.725,50.677 21.377,52.025 19.23,52.025 19.2,51.995 19.2,53.15 17.808,53.15 17.808,59.575 20.125,59.575 20.125,56.45 20.175,56.4 20.15,56.375 20.15,53.65
+3,3В on Top Layer "NONET_L-01_P-001" (solid, remove dead copper, pour order 0): 12.675,58.325 13.925,59.575 17.3,59.575 17.3,53.1 20.95,53.1 20.95,50.875 15.9,50.875 15.9,49.075 14.25,49.075 13.85,49.475 13.75,49.475 13.75,52.6 13.075,53.275 12.675,53.275
+5В_RPI on Top Layer "+5В_RPI_L01_P008" (solid, pour order 8): 20.3,6.85 16.1,11.05 6.45,11.05 4.85,12.65 0.15,12.65 0.15,7.15 0.192,7.108 4.925,7.108 7.106,4.927 7.106,1.306 20.3,1.306
GND on Layer 1 "GND_L02_P009" (solid, pour order 9): 1.65,65.15 54.65,65.15 56.15,63.65 56.15,1.65 54.65,0.15 1.65,0.15 0.15,1.65 0.15,63.65
GND on Layer 2 "GND_L03_P010" (solid, pour order 10): 1.65,65.15 54.65,65.15 56.15,63.65 56.15,1.65 54.65,0.15 1.65,0.15 0.15,1.65 0.15,63.65

## Silkscreen, mask and mechanical layers (free items; w line width, h text height)
Top Overlay:
  lines w0.2: 7.39,19.205 8.39,19.205 ; 7.4,44 8.4,44 ; 17.005,14.915 18.005,14.915 ; 19.05,6.85 19.05,7.85 ; 22.39,60.71 22.39,61.71 ; 40.19,8.81 40.19,9.81 ; 42.56,46.54 43.56,46.54 ; 42.57,26.54 43.57,26.54 ; 42.57,35.54 43.57,35.54 ; 48.09,22.235 48.09,23.235
  text "ESP32-S3-WROOM1" at 22.79,60.727 h1.6
  text "+3,3В" at 43.9,52.723 h1.6
  text "GND" at 44.4,50.617 h1.6
  text "SDA" at 44.4,48.617 h1.6
  text "Color sensor" at 43.543,46.94 h1.6 r90
  text "SCL" at 44.5,46.617 h1.6
  text "Power control board" at 8.383,44.4 h1.6 r90
  text "GND" at 44.41,39.617 h1.6
  text "+3,3В" at 43.91,37.723 h1.6
  text "Light sensor" at 43.607,36 h1.6 r90
  text "SIG" at 44.9,35.617 h1.6
  text "SIG" at 44.9,28.617 h1.6
  text "Latch" at 43.583,27 h1.6 r90
  text "BOOT" at 21.9,26.717 h1.6
  text "RESET" at 32.4,26.717 h1.6
  text "GND" at 44.41,26.617 h1.6
  text "Servo" at 48.49,22.252 h1.6
  text "Sensor commutation board" at 8.373,19.605 h1.6 r90
  text "SIG" at 46.7,17.817 h1.6
  text "+5В" at 49.2,17.817 h1.6
  text "GND" at 51.7,17.817 h1.6
  text "IMU BNO055" at 17.988,15.315 h1.6 r90
  text "USB" at 40.59,8.827 h1.6
  text "Commutation board" at 19.45,6.867 h1.6
Mechanical 1:
  circle w0.3: c11.035,21.485 r1
  circle w0.3: c48.075,47.15 r0.8
  circle w0.3: c21.34,4.065 r0.5
  circle w0.3: c2.38,8.52 r1
  circle w0.3: c11.035,46.285 r0.5
  circle w0.3: c48.075,27.15 r0.8
  circle w0.3: c48.075,36.15 r0.8
  lines w0.3: 0.15,1.65 1.65,0.15 54.65,0.15 56.15,1.65 56.15,63.65 54.65,65.15 1.65,65.15 0.15,63.65 0.15,1.65 ; 20.147,53.65 20.147,60.15 38.147,60.15 38.147,53.65 20.147,53.65

## Text inside footprints (layer, text, board x,y; h text height)
TP1: Top Overlay "U0 TX" at 13.507,42.8 h1.6
TP2: Top Overlay "U0_RX" at 13.707,41.5 h1.6